# EAGLE board BlueSMiRF-ChipAnt-Panel (EAGLE 6.4), part 1 of 2
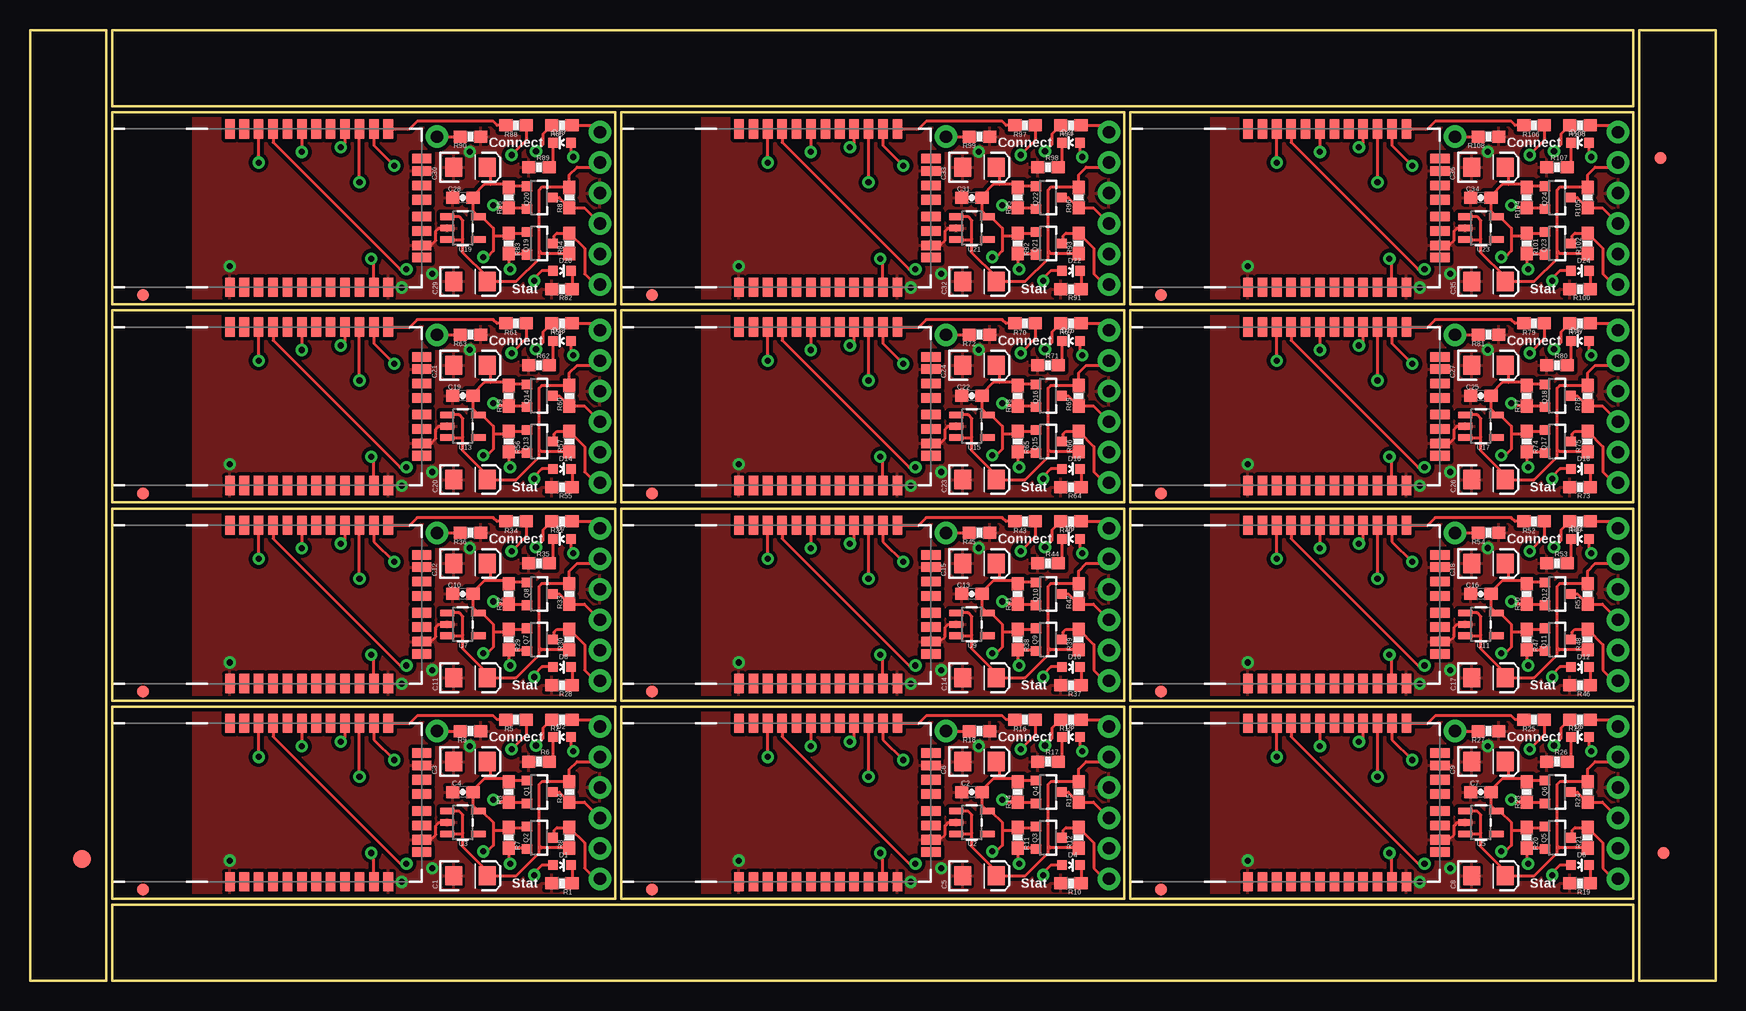
[diagram p0: board, top side]
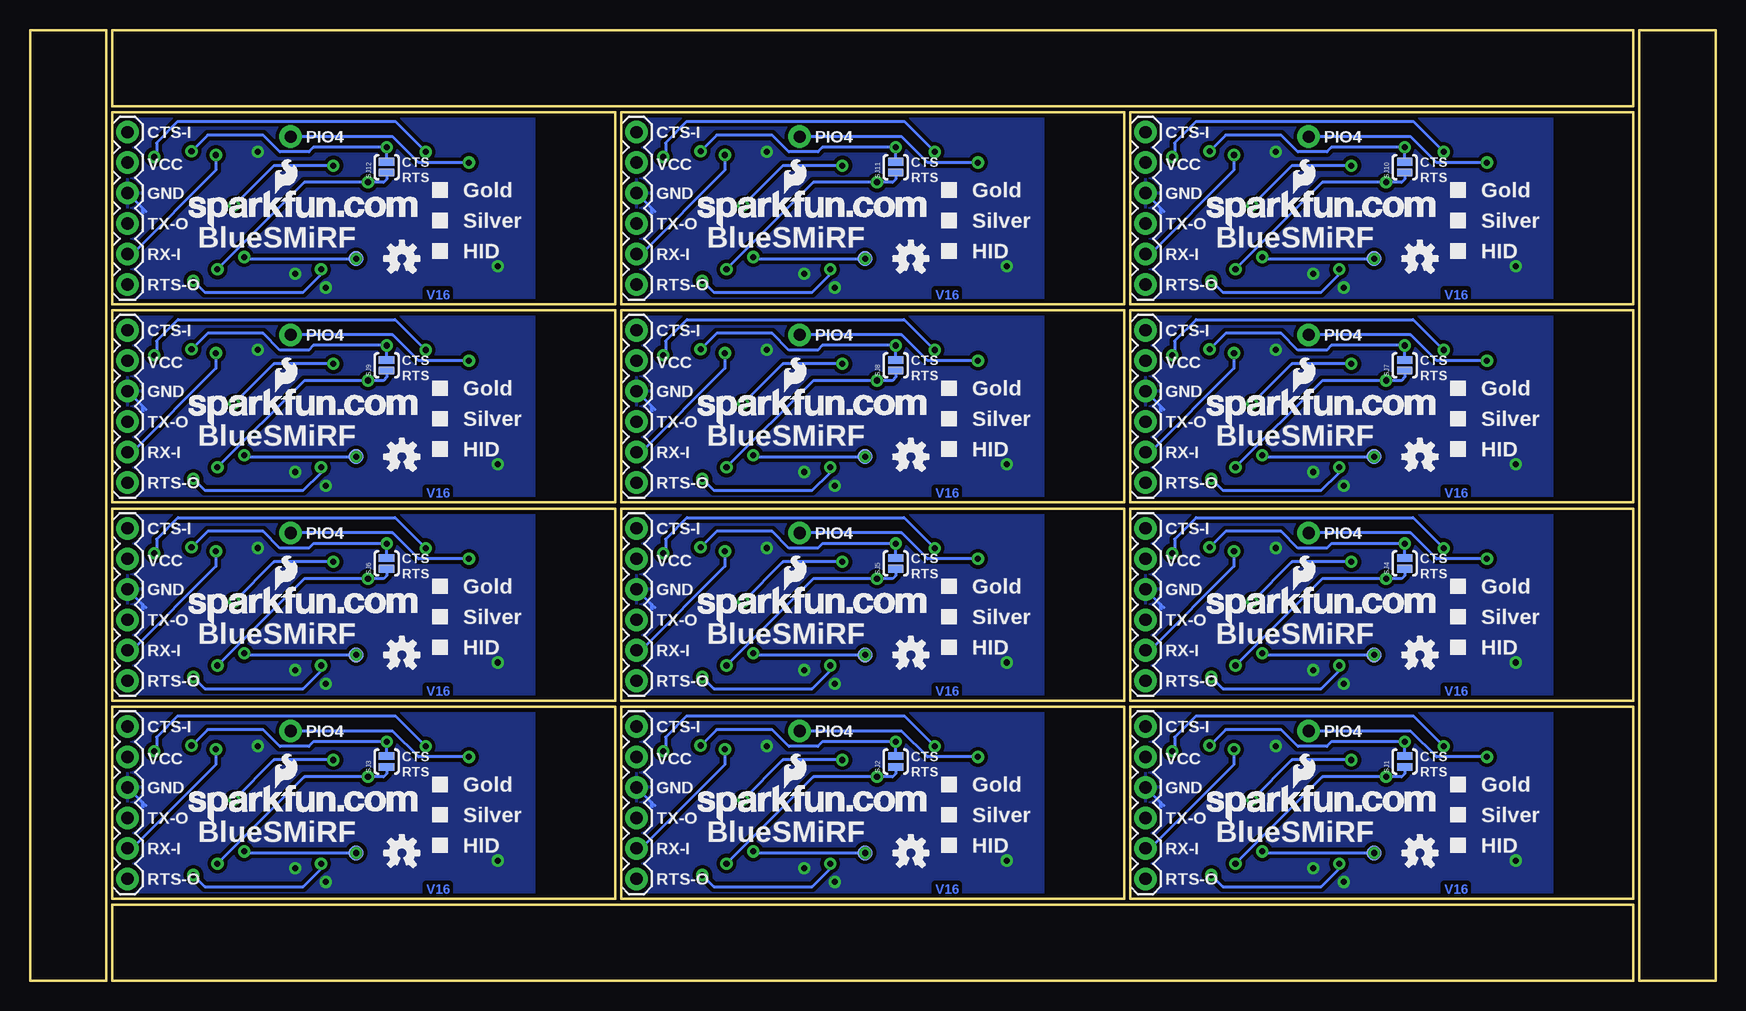
[diagram p1: board, bottom side, seen from below]

Size 140.46 x 79.25 mm. Coordinates in mm from the lower left corner, seen from the top.
Outline: 6.86,6.86 48.77,6.86 48.77,22.86 6.86,22.86 6.86,6.86
Outline: 49.28,6.86 91.19,6.86 91.19,22.86 49.28,22.86 49.28,6.86
Outline: 91.69,6.86 133.6,6.86 133.6,22.86 91.69,22.86 91.69,6.86
Outline: 6.86,23.37 48.77,23.37 48.77,39.37 6.86,39.37 6.86,23.37
Outline: 49.28,23.37 91.19,23.37 91.19,39.37 49.28,39.37 49.28,23.37
Outline: 91.69,23.37 133.6,23.37 133.6,39.37 91.69,39.37 91.69,23.37
Outline: 6.86,39.88 48.77,39.88 48.77,55.88 6.86,55.88 6.86,39.88
Outline: 49.28,39.88 91.19,39.88 91.19,55.88 49.28,55.88 49.28,39.88
Outline: 91.69,39.88 133.6,39.88 133.6,55.88 91.69,55.88 91.69,39.88
Outline: 6.86,56.39 48.77,56.39 48.77,72.39 6.86,72.39 6.86,56.39
Outline: 49.28,56.39 91.19,56.39 91.19,72.39 49.28,72.39 49.28,56.39
Outline: 91.69,56.39 133.6,56.39 133.6,72.39 91.69,72.39 91.69,56.39
Outline: 6.35,0 6.35,79.25 0,79.25 0,0 6.35,0
Outline: 6.86,0 133.6,0 133.6,6.35 6.86,6.35 6.86,0
Outline: 140.46,0 140.46,79.25 134.11,79.25 134.11,0 140.46,0
Outline: 133.6,79.25 6.86,79.25 6.86,72.9 133.6,72.9 133.6,79.25
Copper layers (1*16): Top 0.035mm / dielectric 1.5mm / Bottom 0.035mm
Design rules "SparkFun *": minimum track width 8mil, minimum drill 20mil, track to track 8mil, track to pad 8mil, pad to pad 8mil, via to via 8mil, smd to smd 8mil, copper to edge 10mil, drill to drill 8mil, minimum pad ring 12mil, minimum via ring 10mil, stop-mask expansion 4mil, vias tented up to drill 20mil, thermal gap 10mil

## Footprints (pad centres in the part's own frame; a part is rotated, then mirrored left to right if it is on the bottom)
EIA3216 = smd 1.4 x 1.6: A 1.4,0; C -1.4,0
0603-CAP = smd 1.1 x 1: 1 -0.85,0; 2 0.85,0
LED-0603 = smd 0.8 x 0.8: A 0,-0.75; C 0,0.75
FIDUCIAL-1.5X3 = smd 1.5 x 1.5: 1 0,0
FIDUCIAL-1X2 = smd 1 x 1: 1 0,0
1X06 = drill 1.016 pad 1.88: 1 0,0; 2 2.54,0; 3 5.08,0; 4 7.62,0; 5 10.16,0; 6 12.7,0
1X01NS = drill 1.016 pad 1.88: 1 0,0
SOT23-3 = smd 0.8 x 0.9: 1 -0.95,-1; 2 0.95,-1; 3 0,1.1
0603-RES = smd 1.1 x 1: 1 -0.85,0; 2 0.85,0
SJ_2S-NO = smd 0.635 x 1.27: 1 -0.45,0; 2 0.45,0
PAD.03X.05 = smd 1.27 x 1.27: P$1 0,0
RN41 = smd 0.8 x 1.6: 1 -6.6,-6.6; 2 -5.4,-6.6; 3 -4.2,-6.6; 4 -3,-6.6; 5 -1.8,-6.6; 6 -0.6,-6.6; 7 0.6,-6.6; 8 1.8,-6.6; 9 3,-6.6; 10 4.2,-6.6; 11 5.4,-6.6; 12 6.6,-6.6; 13 6.6,6.6; 14 5.4,6.6; 15 4.2,6.6; 16 3,6.6; 17 1.8,6.6; 18 0.6,6.6; 19 -0.6,6.6; 20 -1.8,6.6; 21 -3,6.6; 22 -4.2,6.6; 23 -5.4,6.6; 24 -6.6,6.6 | smd 1.6 x 0.8: 28 9.4,3.1; 29 9.4,-3.1; 30 9.4,4.122; 31 9.4,1.9; 32 9.4,0.7; 33 9.4,-0.7; 34 9.4,-1.9; 35 9.4,-4.122
SOT23-5 = smd 0.55 x 1.2: 1 -0.95,-1.3; 2 0,-1.3; 3 0.95,-1.3; 4 0.95,1.3; 5 -0.95,1.3

## Placement (x,y rotation side)
C1  10uF  [EIA3216]  36.7,8.76 0 top
C2  1uF  [0603-CAP]  78.49,15.75 180 top
C3  10uF  [EIA3216]  36.7,18.29 0 top
C4  1uF  [0603-CAP]  36.07,15.75 180 top
C5  10uF  [EIA3216]  79.12,8.76 0 top
C6  10uF  [EIA3216]  79.12,18.29 0 top
C7  1uF  [0603-CAP]  120.9,15.75 180 top
C8  10uF  [EIA3216]  121.54,8.76 0 top
C9  10uF  [EIA3216]  121.54,18.29 0 top
C10  1uF  [0603-CAP]  36.07,32.26 180 top
C11  10uF  [EIA3216]  36.7,25.27 0 top
C12  10uF  [EIA3216]  36.7,34.8 0 top
C13  1uF  [0603-CAP]  78.49,32.26 180 top
C14  10uF  [EIA3216]  79.12,25.27 0 top
C15  10uF  [EIA3216]  79.12,34.8 0 top
C16  1uF  [0603-CAP]  120.9,32.26 180 top
C17  10uF  [EIA3216]  121.54,25.27 0 top
C18  10uF  [EIA3216]  121.54,34.8 0 top
C19  1uF  [0603-CAP]  36.07,48.77 180 top
C20  10uF  [EIA3216]  36.7,41.78 0 top
C21  10uF  [EIA3216]  36.7,51.31 0 top
C22  1uF  [0603-CAP]  78.49,48.77 180 top
C23  10uF  [EIA3216]  79.12,41.78 0 top
C24  10uF  [EIA3216]  79.12,51.31 0 top
C25  1uF  [0603-CAP]  120.9,48.77 180 top
C26  10uF  [EIA3216]  121.54,41.78 0 top
C27  10uF  [EIA3216]  121.54,51.31 0 top
C28  1uF  [0603-CAP]  36.07,65.28 180 top
C29  10uF  [EIA3216]  36.7,58.29 0 top
C30  10uF  [EIA3216]  36.7,67.82 0 top
C31  1uF  [0603-CAP]  78.49,65.28 180 top
C32  10uF  [EIA3216]  79.12,58.29 0 top
C33  10uF  [EIA3216]  79.12,67.82 0 top
C34  1uF  [0603-CAP]  120.9,65.28 180 top
C35  10uF  [EIA3216]  121.54,58.29 0 top
C36  10uF  [EIA3216]  121.54,67.82 0 top
D1  Red  [LED-0603]  44.32,9.65 270 top
D2  Green  [LED-0603]  44.32,20.32 90 top
D3  Green  [LED-0603]  86.74,20.32 90 top
D4  Red  [LED-0603]  86.74,9.65 270 top
D5  Green  [LED-0603]  129.16,20.32 90 top
D6  Red  [LED-0603]  129.16,9.65 270 top
D7  Green  [LED-0603]  44.32,36.83 90 top
D8  Red  [LED-0603]  44.32,26.16 270 top
D9  Green  [LED-0603]  86.74,36.83 90 top
D10  Red  [LED-0603]  86.74,26.16 270 top
D11  Green  [LED-0603]  129.16,36.83 90 top
D12  Red  [LED-0603]  129.16,26.16 270 top
D13  Green  [LED-0603]  44.32,53.34 90 top
D14  Red  [LED-0603]  44.32,42.67 270 top
D15  Green  [LED-0603]  86.74,53.34 90 top
D16  Red  [LED-0603]  86.74,42.67 270 top
D17  Green  [LED-0603]  129.16,53.34 90 top
D18  Red  [LED-0603]  129.16,42.67 270 top
D19  Green  [LED-0603]  44.32,69.85 90 top
D20  Red  [LED-0603]  44.32,59.18 270 top
D21  Green  [LED-0603]  86.74,69.85 90 top
D22  Red  [LED-0603]  86.74,59.18 270 top
D23  Green  [LED-0603]  129.16,69.85 90 top
D24  Red  [LED-0603]  129.16,59.18 270 top
E$1  [FIDUCIAL-1.5X3]  4.32,10.16 0 top
E$4  [FIDUCIAL-1X2]  136.14,10.67 0 top
E$6  [FIDUCIAL-1X2]  135.89,68.58 180 top
JP1  [1X06]  47.5,21.21 270 bottom
JP2  M01SMDNS  [1X01NS]  33.91,20.83 0 top
JP3  [1X06]  89.92,21.21 270 bottom
JP4  FIDUCIAL1X2  [FIDUCIAL-1X2]  9.4,7.62 0 top
JP5  M01SMDNS  [1X01NS]  76.33,20.83 0 top
JP6  FIDUCIAL1X2  [FIDUCIAL-1X2]  51.82,7.62 0 top
JP7  [1X06]  132.33,21.21 270 bottom
JP8  M01SMDNS  [1X01NS]  118.75,20.83 0 top
JP9  FIDUCIAL1X2  [FIDUCIAL-1X2]  94.23,7.62 0 top
JP10  [1X06]  47.5,37.72 270 bottom
JP11  M01SMDNS  [1X01NS]  33.91,37.34 0 top
JP12  FIDUCIAL1X2  [FIDUCIAL-1X2]  9.4,24.13 0 top
JP13  [1X06]  89.92,37.72 270 bottom
JP14  M01SMDNS  [1X01NS]  76.33,37.34 0 top
JP15  FIDUCIAL1X2  [FIDUCIAL-1X2]  51.82,24.13 0 top
JP16  [1X06]  132.33,37.72 270 bottom
JP17  M01SMDNS  [1X01NS]  118.75,37.34 0 top
JP18  FIDUCIAL1X2  [FIDUCIAL-1X2]  94.23,24.13 0 top
JP19  [1X06]  47.5,54.23 270 bottom
JP20  M01SMDNS  [1X01NS]  33.91,53.85 0 top
JP21  FIDUCIAL1X2  [FIDUCIAL-1X2]  9.4,40.64 0 top
JP22  [1X06]  89.92,54.23 270 bottom
JP23  M01SMDNS  [1X01NS]  76.33,53.85 0 top
JP24  FIDUCIAL1X2  [FIDUCIAL-1X2]  51.82,40.64 0 top
JP25  [1X06]  132.33,54.23 270 bottom
JP26  M01SMDNS  [1X01NS]  118.75,53.85 0 top
JP27  FIDUCIAL1X2  [FIDUCIAL-1X2]  94.23,40.64 0 top
JP28  [1X06]  47.5,70.74 270 bottom
JP29  M01SMDNS  [1X01NS]  33.91,70.36 0 top
JP30  FIDUCIAL1X2  [FIDUCIAL-1X2]  9.4,57.15 0 top
JP31  [1X06]  89.92,70.74 270 bottom
JP32  M01SMDNS  [1X01NS]  76.33,70.36 0 top
JP33  FIDUCIAL1X2  [FIDUCIAL-1X2]  51.82,57.15 0 top
JP34  [1X06]  132.33,70.74 270 bottom
JP35  M01SMDNS  [1X01NS]  118.75,70.36 0 top
JP36  FIDUCIAL1X2  [FIDUCIAL-1X2]  94.23,57.15 0 top
LOGO1  OSHW-LOGOS  [OSHW-LOGO-S]  24.64,10.67 0 bottom
LOGO2  OSHW-LOGOS  [OSHW-LOGO-S]  67.06,10.67 0 bottom
LOGO3  OSHW-LOGOS  [OSHW-LOGO-S]  109.47,10.67 0 bottom
LOGO4  OSHW-LOGOS  [OSHW-LOGO-S]  24.64,27.18 0 bottom
LOGO5  OSHW-LOGOS  [OSHW-LOGO-S]  67.06,27.18 0 bottom
LOGO6  OSHW-LOGOS  [OSHW-LOGO-S]  109.47,27.18 0 bottom
LOGO7  OSHW-LOGOS  [OSHW-LOGO-S]  24.64,43.69 0 bottom
LOGO8  OSHW-LOGOS  [OSHW-LOGO-S]  67.06,43.69 0 bottom
LOGO9  OSHW-LOGOS  [OSHW-LOGO-S]  109.47,43.69 0 bottom
LOGO10  OSHW-LOGOS  [OSHW-LOGO-S]  24.64,60.2 0 bottom
LOGO11  OSHW-LOGOS  [OSHW-LOGO-S]  67.06,60.2 0 bottom
LOGO12  OSHW-LOGOS  [OSHW-LOGO-S]  109.47,60.2 0 bottom
Q1  MOSFET-NCHANNELSMD  [SOT23-3]  42.42,15.75 270 top
Q2  MOSFET-NCHANNELSMD  [SOT23-3]  42.42,11.94 270 top
Q3  MOSFET-NCHANNELSMD  [SOT23-3]  84.84,11.94 270 top
Q4  MOSFET-NCHANNELSMD  [SOT23-3]  84.84,15.75 270 top
Q5  MOSFET-NCHANNELSMD  [SOT23-3]  127.25,11.94 270 top
Q6  MOSFET-NCHANNELSMD  [SOT23-3]  127.25,15.75 270 top
Q7  MOSFET-NCHANNELSMD  [SOT23-3]  42.42,28.45 270 top
Q8  MOSFET-NCHANNELSMD  [SOT23-3]  42.42,32.26 270 top
Q9  MOSFET-NCHANNELSMD  [SOT23-3]  84.84,28.45 270 top
Q10  MOSFET-NCHANNELSMD  [SOT23-3]  84.84,32.26 270 top
Q11  MOSFET-NCHANNELSMD  [SOT23-3]  127.25,28.45 270 top
Q12  MOSFET-NCHANNELSMD  [SOT23-3]  127.25,32.26 270 top
Q13  MOSFET-NCHANNELSMD  [SOT23-3]  42.42,44.96 270 top
Q14  MOSFET-NCHANNELSMD  [SOT23-3]  42.42,48.77 270 top
Q15  MOSFET-NCHANNELSMD  [SOT23-3]  84.84,44.96 270 top
Q16  MOSFET-NCHANNELSMD  [SOT23-3]  84.84,48.77 270 top
Q17  MOSFET-NCHANNELSMD  [SOT23-3]  127.25,44.96 270 top
Q18  MOSFET-NCHANNELSMD  [SOT23-3]  127.25,48.77 270 top
Q19  MOSFET-NCHANNELSMD  [SOT23-3]  42.42,61.47 270 top
Q20  MOSFET-NCHANNELSMD  [SOT23-3]  42.42,65.28 270 top
Q21  MOSFET-NCHANNELSMD  [SOT23-3]  84.84,61.47 270 top
Q22  MOSFET-NCHANNELSMD  [SOT23-3]  84.84,65.28 270 top
Q23  MOSFET-NCHANNELSMD  [SOT23-3]  127.25,61.47 270 top
Q24  MOSFET-NCHANNELSMD  [SOT23-3]  127.25,65.28 270 top
R1  330  [0603-RES]  44.32,8.13 180 top
R2  10K  [0603-RES]  44.32,21.78 0 top
R3  10K  [0603-RES]  39.88,15.75 270 top
R4  10K  [0603-RES]  44.96,15.75 270 top
R5  10K  [0603-RES]  40.51,21.78 0 top
R6  330  [0603-RES]  42.42,18.29 180 top
R7  10K  [0603-RES]  39.88,11.94 270 top
R8  10K  [0603-RES]  44.96,11.94 90 top
R9  10K  [0603-RES]  36.7,20.83 180 top
R10  330  [0603-RES]  86.74,8.13 180 top
R11  10K  [0603-RES]  82.3,11.94 270 top
R12  10K  [0603-RES]  87.38,11.94 90 top
R13  10K  [0603-RES]  86.74,21.78 0 top
R14  10K  [0603-RES]  82.3,15.75 270 top
R15  10K  [0603-RES]  87.38,15.75 270 top
R16  10K  [0603-RES]  82.93,21.78 0 top
R17  330  [0603-RES]  84.84,18.29 180 top
R18  10K  [0603-RES]  79.12,20.83 180 top
R19  330  [0603-RES]  129.16,8.13 180 top
R20  10K  [0603-RES]  124.71,11.94 270 top
R21  10K  [0603-RES]  129.79,11.94 90 top
R22  10K  [0603-RES]  129.16,21.78 0 top
R23  10K  [0603-RES]  124.71,15.75 270 top
R24  10K  [0603-RES]  129.79,15.75 270 top
R25  10K  [0603-RES]  125.35,21.78 0 top
R26  330  [0603-RES]  127.25,18.29 180 top
R27  10K  [0603-RES]  121.54,20.83 180 top
R28  330  [0603-RES]  44.32,24.64 180 top
R29  10K  [0603-RES]  39.88,28.45 270 top
R30  10K  [0603-RES]  44.96,28.45 90 top
R31  10K  [0603-RES]  44.32,38.29 0 top
R32  10K  [0603-RES]  39.88,32.26 270 top
R33  10K  [0603-RES]  44.96,32.26 270 top
R34  10K  [0603-RES]  40.51,38.29 0 top
R35  330  [0603-RES]  42.42,34.8 180 top
R36  10K  [0603-RES]  36.7,37.34 180 top
R37  330  [0603-RES]  86.74,24.64 180 top
R38  10K  [0603-RES]  82.3,28.45 270 top
R39  10K  [0603-RES]  87.38,28.45 90 top
R40  10K  [0603-RES]  86.74,38.29 0 top
R41  10K  [0603-RES]  82.3,32.26 270 top
R42  10K  [0603-RES]  87.38,32.26 270 top
R43  10K  [0603-RES]  82.93,38.29 0 top
R44  330  [0603-RES]  84.84,34.8 180 top
R45  10K  [0603-RES]  79.12,37.34 180 top
R46  330  [0603-RES]  129.16,24.64 180 top
R47  10K  [0603-RES]  124.71,28.45 270 top
R48  10K  [0603-RES]  129.79,28.45 90 top
R49  10K  [0603-RES]  129.16,38.29 0 top
R50  10K  [0603-RES]  124.71,32.26 270 top
R51  10K  [0603-RES]  129.79,32.26 270 top
R52  10K  [0603-RES]  125.35,38.29 0 top
R53  330  [0603-RES]  127.25,34.8 180 top
R54  10K  [0603-RES]  121.54,37.34 180 top
R55  330  [0603-RES]  44.32,41.15 180 top
R56  10K  [0603-RES]  39.88,44.96 270 top
R57  10K  [0603-RES]  44.96,44.96 90 top
R58  10K  [0603-RES]  44.32,54.8 0 top
R59  10K  [0603-RES]  39.88,48.77 270 top
R60  10K  [0603-RES]  44.96,48.77 270 top
R61  10K  [0603-RES]  40.51,54.8 0 top
R62  330  [0603-RES]  42.42,51.31 180 top
R63  10K  [0603-RES]  36.7,53.85 180 top
R64  330  [0603-RES]  86.74,41.15 180 top
R65  10K  [0603-RES]  82.3,44.96 270 top
R66  10K  [0603-RES]  87.38,44.96 90 top
R67  10K  [0603-RES]  86.74,54.8 0 top
R68  10K  [0603-RES]  82.3,48.77 270 top
R69  10K  [0603-RES]  87.38,48.77 270 top
R70  10K  [0603-RES]  82.93,54.8 0 top
R71  330  [0603-RES]  84.84,51.31 180 top
R72  10K  [0603-RES]  79.12,53.85 180 top
R73  330  [0603-RES]  129.16,41.15 180 top
R74  10K  [0603-RES]  124.71,44.96 270 top
R75  10K  [0603-RES]  129.79,44.96 90 top
R76  10K  [0603-RES]  129.16,54.8 0 top
R77  10K  [0603-RES]  124.71,48.77 270 top
R78  10K  [0603-RES]  129.79,48.77 270 top
R79  10K  [0603-RES]  125.35,54.8 0 top
R80  330  [0603-RES]  127.25,51.31 180 top
R81  10K  [0603-RES]  121.54,53.85 180 top
R82  330  [0603-RES]  44.32,57.66 180 top
R83  10K  [0603-RES]  39.88,61.47 270 top
R84  10K  [0603-RES]  44.96,61.47 90 top
R85  10K  [0603-RES]  44.32,71.31 0 top
R86  10K  [0603-RES]  39.88,65.28 270 top
R87  10K  [0603-RES]  44.96,65.28 270 top
R88  10K  [0603-RES]  40.51,71.31 0 top
R89  330  [0603-RES]  42.42,67.82 180 top
R90  10K  [0603-RES]  36.7,70.36 180 top
R91  330  [0603-RES]  86.74,57.66 180 top
R92  10K  [0603-RES]  82.3,61.47 270 top
R93  10K  [0603-RES]  87.38,61.47 90 top
R94  10K  [0603-RES]  86.74,71.31 0 top
R95  10K  [0603-RES]  82.3,65.28 270 top
R96  10K  [0603-RES]  87.38,65.28 270 top
R97  10K  [0603-RES]  82.93,71.31 0 top
R98  330  [0603-RES]  84.84,67.82 180 top
R99  10K  [0603-RES]  79.12,70.36 180 top
R100  330  [0603-RES]  129.16,57.66 180 top
R101  10K  [0603-RES]  124.71,61.47 270 top
R102  10K  [0603-RES]  129.79,61.47 90 top
R103  10K  [0603-RES]  129.16,71.31 0 top
R104  10K  [0603-RES]  124.71,65.28 270 top
R105  10K  [0603-RES]  129.79,65.28 270 top
R106  10K  [0603-RES]  125.35,71.31 0 top
R107  330  [0603-RES]  127.25,67.82 180 top
R108  10K  [0603-RES]  121.54,70.36 180 top
SJ1  SOLDERJUMPERNO  [SJ_2S-NO]  25.91,18.29 90 bottom
SJ2  SOLDERJUMPERNO  [SJ_2S-NO]  68.33,18.29 90 bottom
SJ3  SOLDERJUMPERNO  [SJ_2S-NO]  110.74,18.29 90 bottom
SJ4  SOLDERJUMPERNO  [SJ_2S-NO]  25.91,34.8 90 bottom
SJ5  SOLDERJUMPERNO  [SJ_2S-NO]  68.33,34.8 90 bottom
SJ6  SOLDERJUMPERNO  [SJ_2S-NO]  110.74,34.8 90 bottom
SJ7  SOLDERJUMPERNO  [SJ_2S-NO]  25.91,51.31 90 bottom
SJ8  SOLDERJUMPERNO  [SJ_2S-NO]  68.33,51.31 90 bottom
SJ9  SOLDERJUMPERNO  [SJ_2S-NO]  110.74,51.31 90 bottom
SJ10  SOLDERJUMPERNO  [SJ_2S-NO]  25.91,67.82 90 bottom
SJ11  SOLDERJUMPERNO  [SJ_2S-NO]  68.33,67.82 90 bottom
SJ12  SOLDERJUMPERNO  [SJ_2S-NO]  110.74,67.82 90 bottom
TP1  [PAD.03X.05]  28.45,10.67 0 bottom
TP2  [PAD.03X.05]  70.87,10.67 0 bottom
TP3  [PAD.03X.05]  113.28,10.67 0 bottom
TP4  [PAD.03X.05]  28.45,27.18 0 bottom
TP5  [PAD.03X.05]  70.87,27.18 0 bottom
TP6  [PAD.03X.05]  113.28,27.18 0 bottom
TP7  [PAD.03X.05]  28.45,43.69 0 bottom
TP8  [PAD.03X.05]  70.87,43.69 0 bottom
TP9  [PAD.03X.05]  113.28,43.69 0 bottom
TP10  [PAD.03X.05]  28.45,60.2 0 bottom
TP11  [PAD.03X.05]  70.87,60.2 0 bottom
TP12  [PAD.03X.05]  113.28,60.2 0 bottom
U1  BLUETOOTH-RN41  [RN41]  23.26,14.87 0 top
U2  3.3V  [SOT23-5]  78.49,13.21 270 top
U3  3.3V  [SOT23-5]  36.07,13.21 270 top
U4  BLUETOOTH-RN41  [RN41]  65.67,14.87 0 top
U5  3.3V  [SOT23-5]  120.9,13.21 270 top
U6  BLUETOOTH-RN41  [RN41]  108.09,14.87 0 top
U7  3.3V  [SOT23-5]  36.07,29.72 270 top
U8  BLUETOOTH-RN41  [RN41]  23.26,31.38 0 top
U9  3.3V  [SOT23-5]  78.49,29.72 270 top
U10  BLUETOOTH-RN41  [RN41]  65.67,31.38 0 top
U11  3.3V  [SOT23-5]  120.9,29.72 270 top
U12  BLUETOOTH-RN41  [RN41]  108.09,31.38 0 top
U13  3.3V  [SOT23-5]  36.07,46.23 270 top
U14  BLUETOOTH-RN41  [RN41]  23.26,47.89 0 top
U15  3.3V  [SOT23-5]  78.49,46.23 270 top
U16  BLUETOOTH-RN41  [RN41]  65.67,47.89 0 top
U17  3.3V  [SOT23-5]  120.9,46.23 270 top
U18  BLUETOOTH-RN41  [RN41]  108.09,47.89 0 top
U19  3.3V  [SOT23-5]  36.07,62.74 270 top
U20  BLUETOOTH-RN41  [RN41]  23.26,64.4 0 top
U21  3.3V  [SOT23-5]  78.49,62.74 270 top
U22  BLUETOOTH-RN41  [RN41]  65.67,64.4 0 top
U23  3.3V  [SOT23-5]  120.9,62.74 270 top
U24  BLUETOOTH-RN41  [RN41]  108.09,64.4 0 top
U$1  LOGO-SFENEW  [SFE-NEW-WEBLOGO]  42.42,13.21 0 bottom
U$2  LOGO-SFENEW  [SFE-NEW-WEBLOGO]  84.84,13.21 0 bottom
U$3  LOGO-SFENEW  [SFE-NEW-WEBLOGO]  127.25,13.21 0 bottom
U$4  LOGO-SFENEW  [SFE-NEW-WEBLOGO]  42.42,29.72 0 bottom
U$5  LOGO-SFENEW  [SFE-NEW-WEBLOGO]  84.84,29.72 0 bottom
U$6  LOGO-SFENEW  [SFE-NEW-WEBLOGO]  127.25,29.72 0 bottom
U$7  LOGO-SFENEW  [SFE-NEW-WEBLOGO]  42.42,46.23 0 bottom
U$8  LOGO-SFENEW  [SFE-NEW-WEBLOGO]  84.84,46.23 0 bottom
U$9  LOGO-SFENEW  [SFE-NEW-WEBLOGO]  127.25,46.23 0 bottom
U$10  LOGO-SFENEW  [SFE-NEW-WEBLOGO]  42.42,62.74 0 bottom
U$11  LOGO-SFENEW  [SFE-NEW-WEBLOGO]  84.84,62.74 0 bottom
U$12  LOGO-SFENEW  [SFE-NEW-WEBLOGO]  127.25,62.74 0 bottom

## Library data of the parts
C1-C36 D1-D24 JP1-JP36 Q1-Q24 R1-R108 SJ1-SJ12 TP1-TP12 U2 U3 U5 U7 U9 U11 U13 U15 U17 U19 U21 U23 U$1-U$12 = SparkFun
E$1 E$4 E$6 LOGO1-LOGO12 = SparkFun-Aesthetics
U1 U4 U6 U8 U10 U12 U14 U16 U18 U20 U22 U24 = SparkFun-RF

## Nets
3.3V: C3.A C4.1 Q1.1 Q2.1 R3.1 R7.1 TP1.P$1 U1.11 U3.5
3.3V1: C2.1 C6.A Q3.1 Q4.1 R11.1 R14.1 TP2.P$1 U2.5 U4.11
3.3V2: C7.1 C9.A Q5.1 Q6.1 R20.1 R23.1 TP3.P$1 U5.5 U6.11
3.3V3: C10.1 C12.A Q7.1 Q8.1 R29.1 R32.1 TP4.P$1 U7.5 U8.11
3.3V4: C13.1 C15.A Q9.1 Q10.1 R38.1 R41.1 TP5.P$1 U9.5 U10.11
3.3V5: C16.1 C18.A Q11.1 Q12.1 R47.1 R50.1 TP6.P$1 U11.5 U12.11
3.3V6: C19.1 C21.A Q13.1 Q14.1 R56.1 R59.1 TP7.P$1 U13.5 U14.11
3.3V7: C22.1 C24.A Q15.1 Q16.1 R65.1 R68.1 TP8.P$1 U15.5 U16.11
3.3V8: C25.1 C27.A Q17.1 Q18.1 R74.1 R77.1 TP9.P$1 U17.5 U18.11
3.3V9: C28.1 C30.A Q19.1 Q20.1 R83.1 R86.1 TP10.P$1 U19.5 U20.11
3.3V10: C31.1 C33.A Q21.1 Q22.1 R92.1 R95.1 TP11.P$1 U21.5 U22.11
3.3V11: C34.1 C36.A Q23.1 Q24.1 R101.1 R104.1 TP12.P$1 U23.5 U24.11
CTS: R2.1 SJ1.2 U1.16
CTS1: R13.1 SJ2.2 U4.16
CTS2: R22.1 SJ3.2 U6.16
CTS3: R31.1 SJ4.2 U8.16
CTS4: R40.1 SJ5.2 U10.16
CTS5: R49.1 SJ6.2 U12.16
CTS6: R58.1 SJ7.2 U14.16
CTS7: R67.1 SJ8.2 U16.16
CTS8: R76.1 SJ9.2 U18.16
CTS9: R85.1 SJ10.2 U20.16
CTS10: R94.1 SJ11.2 U22.16
CTS11: R103.1 SJ12.2 U24.16
CTS_5V: JP1.1 R2.2
CTS_5V1: JP3.1 R13.2
CTS_5V2: JP7.1 R22.2
CTS_5V3: JP10.1 R31.2
CTS_5V4: JP13.1 R40.2
CTS_5V5: JP16.1 R49.2
CTS_5V6: JP19.1 R58.2
CTS_5V7: JP22.1 R67.2
CTS_5V8: JP25.1 R76.2
CTS_5V9: JP28.1 R85.2
CTS_5V10: JP31.1 R94.2
CTS_5V11: JP34.1 R103.2
D1: D1.C R1.1
D2: D2.C R6.1
D3: D4.C R10.1
D4: D3.C R17.1
D5: D6.C R19.1
D6: D5.C R26.1
D7: D8.C R28.1
D8: D7.C R35.1
D9: D10.C R37.1
D10: D9.C R44.1
D11: D12.C R46.1
D12: D11.C R53.1
D13: D14.C R55.1
D14: D13.C R62.1
D15: D16.C R64.1
D16: D15.C R71.1
D17: D18.C R73.1
D18: D17.C R80.1
D19: D20.C R82.1
D20: D19.C R89.1
D21: D22.C R91.1
D22: D21.C R98.1
D23: D24.C R100.1
D24: D23.C R107.1
GND: C1.C C3.C C4.2 JP1.3 R1.2 R6.2 R9.1 U1.1 U1.12 U1.28 U1.29 U3.2
GND1: C2.2 C5.C C6.C JP3.3 R10.2 R17.2 R18.1 U2.2 U4.1 U4.12 U4.28 U4.29
GND2: C7.2 C8.C C9.C JP7.3 R19.2 R26.2 R27.1 U5.2 U6.1 U6.12 U6.28 U6.29
GND3: C10.2 C11.C C12.C JP10.3 R28.2 R35.2 R36.1 U7.2 U8.1 U8.12 U8.28 U8.29
GND4: C13.2 C14.C C15.C JP13.3 R37.2 R44.2 R45.1 U9.2 U10.1 U10.12 U10.28 U10.29
GND5: C16.2 C17.C C18.C JP16.3 R46.2 R53.2 R54.1 U11.2 U12.1 U12.12 U12.28 U12.29
GND6: C19.2 C20.C C21.C JP19.3 R55.2 R62.2 R63.1 U13.2 U14.1 U14.12 U14.28 U14.29
GND7: C22.2 C23.C C24.C JP22.3 R64.2 R71.2 R72.1 U15.2 U16.1 U16.12 U16.28 U16.29
GND8: C25.2 C26.C C27.C JP25.3 R73.2 R80.2 R81.1 U17.2 U18.1 U18.12 U18.28 U18.29
GND9: C28.2 C29.C C30.C JP28.3 R82.2 R89.2 R90.1 U19.2 U20.1 U20.12 U20.28 U20.29
GND10: C31.2 C32.C C33.C JP31.3 R91.2 R98.2 R99.1 U21.2 U22.1 U22.12 U22.28 U22.29
GND11: C34.2 C35.C C36.C JP34.3 R100.2 R107.2 R108.1 U23.2 U24.1 U24.12 U24.28 U24.29
N$1: D1.A U1.21
N$2: D2.A U1.19
N$3: D4.A U4.21
N$4: D3.A U4.19
N$5: D6.A U6.21
N$6: D5.A U6.19
N$7: D8.A U8.21
N$8: D7.A U8.19
N$9: D10.A U10.21
N$10: D9.A U10.19
N$11: D12.A U12.21
N$12: D11.A U12.19
N$13: D14.A U14.21
N$14: D13.A U14.19
N$15: D16.A U16.21
N$16: D15.A U16.19
N$17: D18.A U18.21
N$18: D17.A U18.19
N$19: D20.A U20.21
N$20: D19.A U20.19
N$21: D22.A U22.21
N$22: D21.A U22.19
N$23: D24.A U24.21
N$24: D23.A U24.19
PIO1: JP5.1 R18.2 U4.22
PIO2: JP8.1 R27.2 U6.22
PIO3: JP11.1 R36.2 U8.22
PIO4: JP2.1 R9.2 U1.22
PIO5: JP14.1 R45.2 U10.22
PIO6: JP17.1 R54.2 U12.22
PIO7: JP20.1 R63.2 U14.22
PIO8: JP23.1 R72.2 U16.22
PIO9: JP26.1 R81.2 U18.22
PIO10: JP29.1 R90.2 U20.22
PIO11: JP32.1 R99.2 U22.22
PIO12: JP35.1 R108.2 U24.22
RTS: Q2.2 R7.2 SJ1.1 U1.15
RTS1: Q3.2 R11.2 SJ2.1 U4.15
RTS2: Q5.2 R20.2 SJ3.1 U6.15
RTS3: Q7.2 R29.2 SJ4.1 U8.15
RTS4: Q9.2 R38.2 SJ5.1 U10.15
RTS5: Q11.2 R47.2 SJ6.1 U12.15
RTS6: Q13.2 R56.2 SJ7.1 U14.15
RTS7: Q15.2 R65.2 SJ8.1 U16.15
RTS8: Q17.2 R74.2 SJ9.1 U18.15
RTS9: Q19.2 R83.2 SJ10.1 U20.15
RTS10: Q21.2 R92.2 SJ11.1 U22.15
RTS11: Q23.2 R101.2 SJ12.1 U24.15
RTS_5V: JP1.6 Q2.3 R8.2
RTS_5V1: JP3.6 Q3.3 R12.2
RTS_5V2: JP7.6 Q5.3 R21.2
RTS_5V3: JP10.6 Q7.3 R30.2
RTS_5V4: JP13.6 Q9.3 R39.2
RTS_5V5: JP16.6 Q11.3 R48.2
RTS_5V6: JP19.6 Q13.3 R57.2
RTS_5V7: JP22.6 Q15.3 R66.2
RTS_5V8: JP25.6 Q17.3 R75.2
RTS_5V9: JP28.6 Q19.3 R84.2
RTS_5V10: JP31.6 Q21.3 R93.2
RTS_5V11: JP34.6 Q23.3 R102.2
RX: R5.1 U1.13
RX1: R16.1 U4.13
RX2: R25.1 U6.13
RX3: R34.1 U8.13
RX4: R43.1 U10.13
RX5: R52.1 U12.13
RX6: R61.1 U14.13
RX7: R70.1 U16.13
RX8: R79.1 U18.13
RX9: R88.1 U20.13
RX10: R97.1 U22.13
RX11: R106.1 U24.13
RX_5V: JP1.5 R5.2
RX_5V1: JP3.5 R16.2
RX_5V2: JP7.5 R25.2
RX_5V3: JP10.5 R34.2
RX_5V4: JP13.5 R43.2
RX_5V5: JP16.5 R52.2
RX_5V6: JP19.5 R61.2
RX_5V7: JP22.5 R70.2
RX_5V8: JP25.5 R79.2
RX_5V9: JP28.5 R88.2
RX_5V10: JP31.5 R97.2
RX_5V11: JP34.5 R106.2
TX: Q1.2 R3.2 U1.14
TX1: Q4.2 R14.2 U4.14
TX2: Q6.2 R23.2 U6.14
TX3: Q8.2 R32.2 U8.14
TX4: Q10.2 R41.2 U10.14
TX5: Q12.2 R50.2 U12.14
TX6: Q14.2 R59.2 U14.14
TX7: Q16.2 R68.2 U16.14
TX8: Q18.2 R77.2 U18.14
TX9: Q20.2 R86.2 U20.14
TX10: Q22.2 R95.2 U22.14
TX11: Q24.2 R104.2 U24.14
TX_5V: JP1.4 Q1.3 R4.2
TX_5V1: JP3.4 Q4.3 R15.2
TX_5V2: JP7.4 Q6.3 R24.2
TX_5V3: JP10.4 Q8.3 R33.2
TX_5V4: JP13.4 Q10.3 R42.2
TX_5V5: JP16.4 Q12.3 R51.2
TX_5V6: JP19.4 Q14.3 R60.2
TX_5V7: JP22.4 Q16.3 R69.2
TX_5V8: JP25.4 Q18.3 R78.2
TX_5V9: JP28.4 Q20.3 R87.2
TX_5V10: JP31.4 Q22.3 R96.2
TX_5V11: JP34.4 Q24.3 R105.2
VCC: C1.A JP1.2 R4.1 R8.1 U3.1 U3.3
VCC1: C5.A JP3.2 R12.1 R15.1 U2.1 U2.3
VCC2: C8.A JP7.2 R21.1 R24.1 U5.1 U5.3
VCC3: C11.A JP10.2 R30.1 R33.1 U7.1 U7.3
VCC4: C14.A JP13.2 R39.1 R42.1 U9.1 U9.3
VCC5: C17.A JP16.2 R48.1 R51.1 U11.1 U11.3
VCC6: C20.A JP19.2 R57.1 R60.1 U13.1 U13.3
VCC7: C23.A JP22.2 R66.1 R69.1 U15.1 U15.3
VCC8: C26.A JP25.2 R75.1 R78.1 U17.1 U17.3
VCC9: C29.A JP28.2 R84.1 R87.1 U19.1 U19.3
VCC10: C32.A JP31.2 R93.1 R96.1 U21.1 U21.3
VCC11: C35.A JP34.2 R102.1 R105.1 U23.1 U23.3